# Altium PCB PCB_Instruction Register 1.0V_2021-10-21.pcbdoc
Units mm, origin at the board's own origin, x right, y up, seen from the top; angles counter-clockwise.
Board outline 124.71 x 83.95 mm, 2 copper layers (Top Layer, Bottom Layer); 28 components, 33 nets, 114 pads, 35 vias.
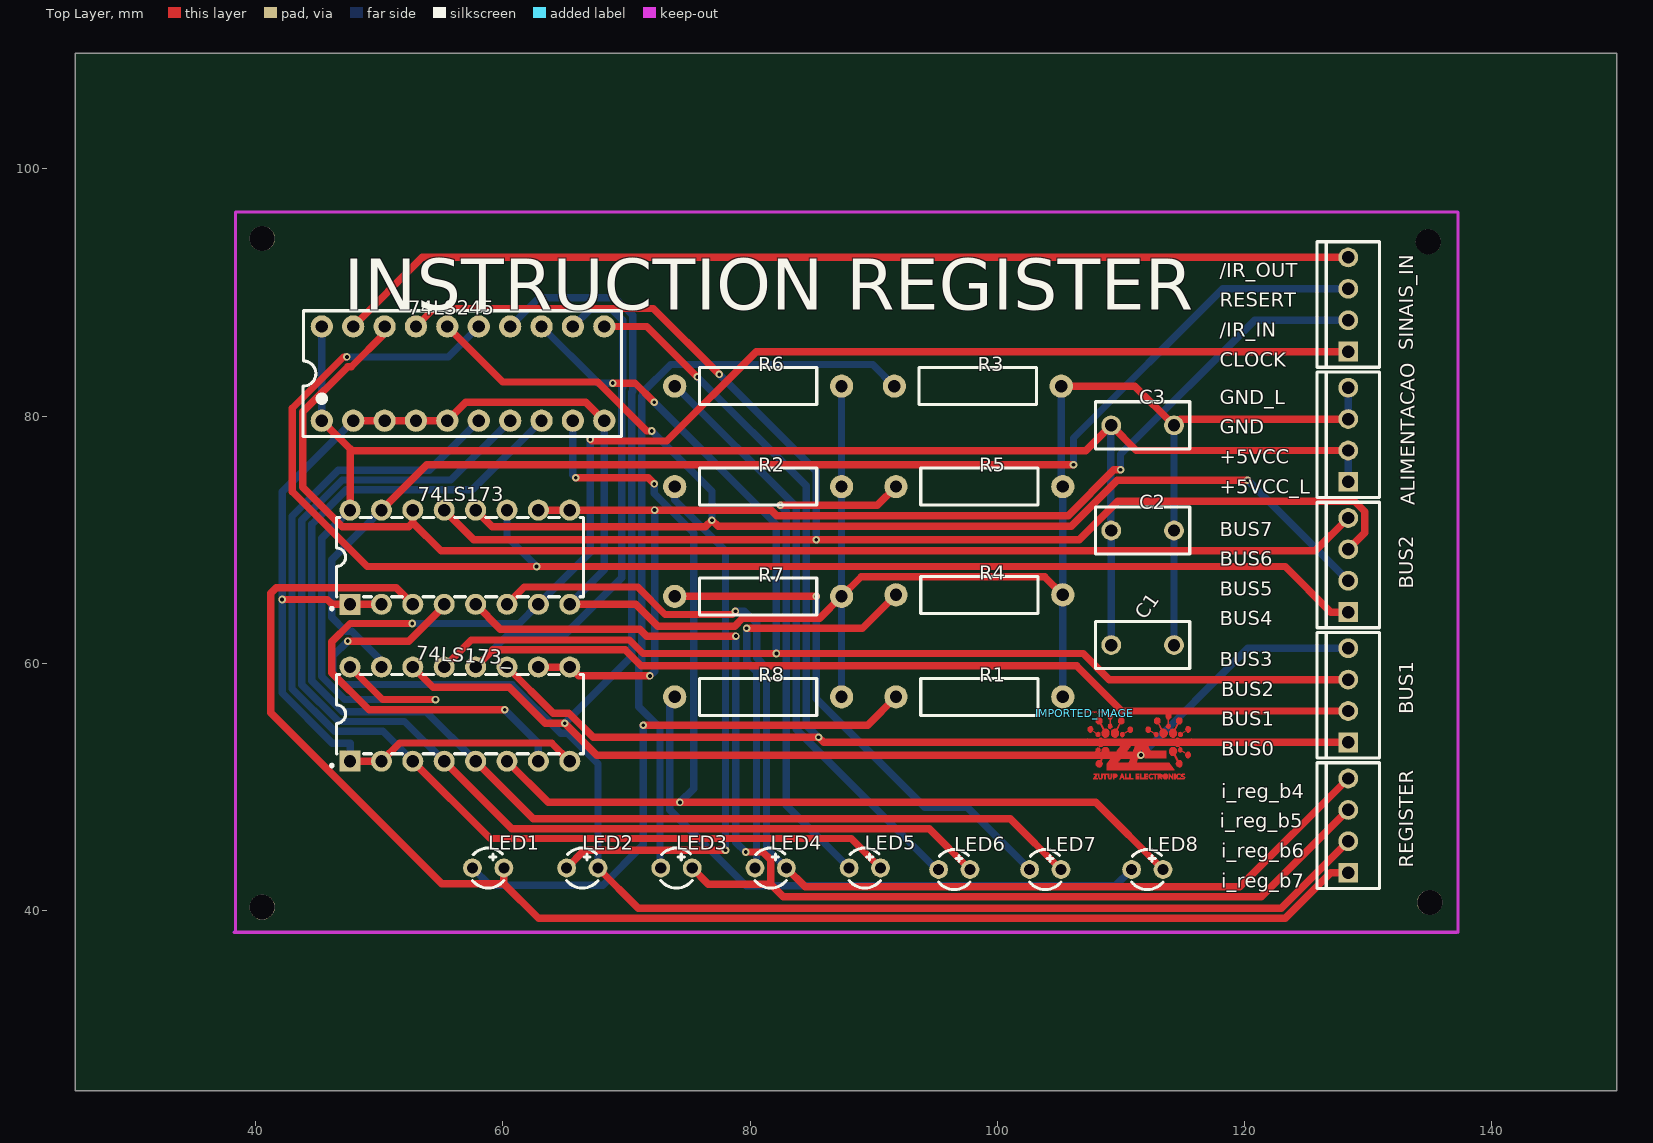
[diagram p0: Top Layer view]
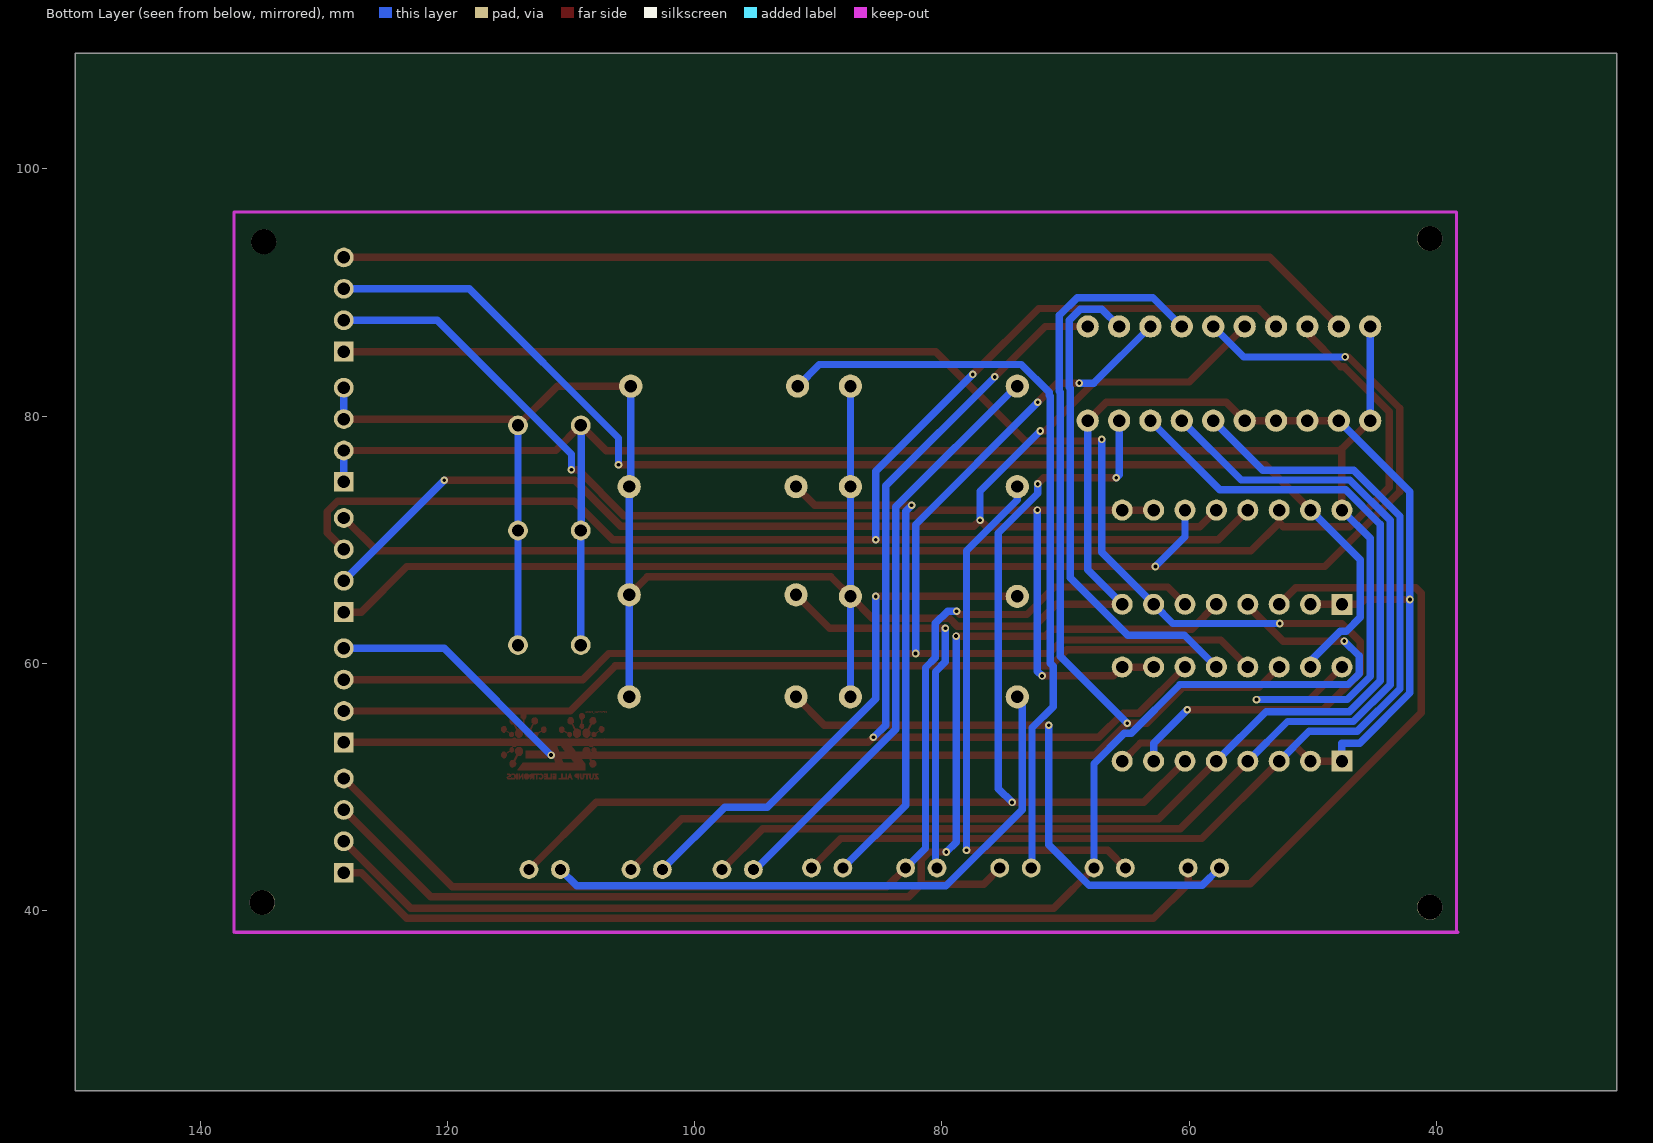
[diagram p1: Bottom Layer view, seen from below]

## Layer stack, top to bottom
Top Layer: signal copper (thickness not stored)
Dielectric: dielectric 0.32, FR-4, Dk 4.8
Bottom Layer: signal copper (thickness not stored)

## Board outline
150.114,25.4 25.4,25.4 25.4,109.347 150.114,109.347

## Components (designator, comment, footprint, x,y, rotation, side; value= is the part's Value field where it differs from the comment)
74LS173 "SN74LS173AN" PDIP-16_L19.7-W6.6-P2.54-LS7.6-BL 56.515,68.58 r0 top
74LS173_ "SN74LS173AN" PDIP-16_L19.7-W6.6-P2.54-LS7.6-BL 56.515,55.88 r0 top
74LS245 "SN74LS245N" DIP-20_L25.5-W10.0-P2.54-LS7.6-BL 56.769,83.439 r0 top
ALIMENTACAO "ALIM." HDR-TH_4P-P2.54-D1.0 128.397,78.486 r90 top
BUS1 "BUS1" HDR-TH_4P-P2.54-D1.0 128.397,57.404 r90 top
BUS2 "BUS2" HDR-TH_4P-P2.54-D1.0 128.397,67.945 r90 top
C1 "100nF 63V poli7" CAP-TH_L7.6-W3.8-P5.08-D0.51 111.76,61.468 r0 top
C2 "100nF 63V poli" CAP-TH_L7.6-W3.8-P5.08-D0.51 111.76,70.739 r0 top
C3 "100nF 63V poli" CAP-TH_L7.6-W3.8-P5.08-D0.51 111.76,79.248 r0 top
IMPORTED_IMAGE "IMPORTED_IMAGE" IMPORTED_IMAGE 107.084,55.95 r0 top
LED1 "VERDE" LED-TH_BD3.0-P2.54-RD-GREEN 58.801,43.434 r0 top
LED2 "VERDE" LED-TH_BD3.0-P2.54-RD-GREEN 66.421,43.434 r0 top
LED3 "VERDE" LED-TH_BD3.0-P2.54-RD-GREEN 74.041,43.434 r0 top
LED4 "VERDE" LED-TH_BD3.0-P2.54-RD-GREEN 81.661,43.434 r0 top
LED5 "VERDE" LED-TH_BD3.0-P2.54-RD-GREEN 89.281,43.434 r0 top
LED6 "VERDE" LED-TH_BD3.0-P2.54-RD-GREEN 96.52,43.307 r0 top
LED7 "VERDE" LED-TH_BD3.0-P2.54-RD-GREEN 103.886,43.307 r0 top
LED8 "VERDE" LED-TH_BD3.0-P2.54-RD-GREEN 112.141,43.307 r0 top
R1 "470" RES-TH_BD3.0-L9.5-P13.50-D0.6 98.552,57.277 r0 top
R2 "470" RES-TH_BD3.0-L9.5-P13.50-D0.6 80.645,74.295 r0 top
R3 "470" RES-TH_BD3.0-L9.5-P13.50-D0.6 98.425,82.423 r0 top
R4 "470" RES-TH_BD3.0-L9.5-P13.50-D0.6 98.552,65.532 r0 top
R5 "470" RES-TH_BD3.0-L9.5-P13.50-D0.6 98.552,74.295 r0 top
R6 "470" RES-TH_BD3.0-L9.5-P13.50-D0.6 80.645,82.423 r0 top
R7 "470" RES-TH_BD3.0-L9.5-P13.50-D0.6 80.645,65.405 r0 top
R8 "470" RES-TH_BD3.0-L9.5-P13.50-D0.6 80.645,57.277 r0 top
REGISTER "REGIST." HDR-TH_4P-P2.54-D1.0 128.397,46.863 r90 top
SINAIS_IN "SINAIS IN" HDR-TH_4P-P2.54-D1.0 128.397,89.027 r90 top

## Footprints (in the part's own frame and the unit in brackets; to place one, negate y for a bottom-side part, rotate by r counter-clockwise, add the part's x,y. Pads: shape width x height; smd on the part's side, far side on the other; paste and mask are expansions set on the pad)
CAP-TH_L7.6-W3.8-P5.08-D0.51 [mm]
  round 1.6 hole 1: 1(-2.54,0) 2(2.54,0)
  silkscreen extent -3.81,-1.91 3.81,1.91
DIP-20_L25.5-W10.0-P2.54-LS7.6-BL [mm]
  round 1.8 hole 1: 1(-11.43,-3.81) 2(-8.89,-3.81) 3(-6.35,-3.81) 4(-3.81,-3.81) 5(-1.27,-3.81) 6(1.27,-3.81) 7(3.81,-3.81) 8(6.35,-3.81) 9(8.89,-3.81) 10(11.43,-3.81) 11(11.43,3.81) 12(8.89,3.81) 13(6.35,3.81) 14(3.81,3.81) 15(1.27,3.81) 16(-1.27,3.81) 17(-3.81,3.81) 18(-6.35,3.81) 19(-8.89,3.81) 20(-11.43,3.81)
  silkscreen extent -12.95,-5.08 12.83,5.08
HDR-TH_4P-P2.54-D1.0 [mm]
  rect 1.6x1.6 hole 1: 1(-3.81,0)
  round 1.6 hole 1: 2(-1.27,0) 3(1.27,0) 4(3.81,0)
  silkscreen extent -5.08,-2.54 5.08,2.54
IMPORTED_IMAGE [mm]
  Top Layer region: 1.05,-5.287 1.063,-5.331 0.684,-5.331 0.684,-5.297 0.685,-5.293 0.686,-5.288 0.689,-5.282 0.692,-5.275 0.696,-5.267 0.7,-5.258 0.706,-5.249 0.712,-5.239 0.718,-5.228 0.726,-5.217 0.733,-5.206 0.741,-5.194 0.75,-5.182 0.759,-5.17 0.768,-5.158 0.778,-5.146 0.798,-5.12 0.815,-5.097 0.83,-5.077 0.842,-5.06 0.852,-5.045 0.859,-5.031 0.863,-5.02 0.865,-5.011 0.865,-5.004 0.862,-4.998 0.857,-4.993 0.849,-4.99 0.839,-4.987 0.826,-4.986 0.811,-4.985 0.793,-4.985 0.716,-4.985 0.716,-4.881 1.027,-4.881 1.027,-4.93 1.026,-4.936 1.025,-4.942 1.023,-4.949 1.02,-4.957 1.017,-4.966 1.013,-4.975 1.009,-4.985 1.004,-4.995 0.998,-5.005 0.992,-5.016 0.986,-5.027 0.979,-5.038 0.972,-5.049 0.964,-5.06 0.957,-5.071 0.949,-5.082 0.932,-5.105 0.917,-5.125 0.904,-5.143 0.894,-5.158 0.886,-5.171 0.881,-5.183 0.878,-5.193 0.877,-5.201 0.878,-5.208 0.882,-5.213 0.888,-5.218 0.897,-5.222 0.907,-5.225 0.921,-5.228 0.936,-5.231 0.954,-5.233 1.037,-5.244
  Top Layer region: 2.302,-5.331 2.302,-4.881 2.393,-4.881 2.415,-4.881 2.436,-4.882 2.456,-4.884 2.474,-4.887 2.491,-4.89 2.507,-4.894 2.522,-4.899 2.536,-4.906 2.549,-4.912 2.561,-4.92 2.572,-4.929 2.582,-4.939 2.591,-4.95 2.6,-4.962 2.608,-4.975 2.615,-4.989 2.647,-5.054 2.583,-5.187 2.489,-5.209 2.395,-5.232 2.395,-5.331 hole: 1094689.812,508877.754 1094689.812,508159.95 1094689.812,508159.95 1095771.598,508391.852 1095771.598,508391.852 1095979.878,509595.304 1095979.878,509595.304 1094689.812,509595.304 1094689.812,509595.304 1094689.812,508877.754
  Top Layer region: 1.68,-5.158 1.68,-5.331 1.587,-5.331 1.587,-4.985 1.47,-4.985 1.452,-5.109 1.448,-5.135 1.442,-5.161 1.436,-5.186 1.429,-5.211 1.421,-5.233 1.413,-5.253 1.405,-5.27 1.398,-5.282 1.361,-5.331 1.153,-5.331 1.089,-5.197 1.089,-4.881 1.182,-4.881 1.182,-5.184 1.273,-5.267 1.305,-5.245 1.338,-5.223 1.338,-4.881 1.804,-4.881 1.804,-4.985 1.68,-4.985
  Top Layer region: 6.671,-5.276 6.622,-5.331 6.413,-5.331 6.315,-5.222 6.315,-5.007 6.418,-4.881 6.617,-4.881 6.665,-4.941 6.679,-4.96 6.692,-4.981 6.702,-5.002 6.711,-5.023 6.717,-5.046 6.722,-5.068 6.725,-5.091 6.727,-5.114 6.726,-5.137 6.724,-5.159 6.72,-5.181 6.713,-5.202 6.706,-5.222 6.696,-5.242 6.684,-5.26 hole: 1135841.114,506853.12 1137036.692,507565.082 1137036.692,507565.082 1136940.426,508493.706 1136940.426,508493.706 1136843.906,509422.33 1136843.906,509422.33 1135999.102,509530.788 1135999.102,509530.788 1135154.552,509638.992 1135154.552,509638.992 1134729.864,507756.852 1134729.864,507756.852 1135841.114,506853.12
  Top Layer region: 4.418,-5.279 4.418,-5.331 4.107,-5.331 4.107,-4.881 4.418,-4.881 4.418,-4.985 4.2,-4.985 4.2,-5.054 4.387,-5.054 4.387,-5.158 4.2,-5.158 4.2,-5.227 4.418,-5.227
  Top Layer region: 7.155,-5.106 7.155,-5.331 7.066,-5.331 6.875,-5.073 6.875,-5.331 6.782,-5.331 6.782,-4.881 6.86,-4.881 6.96,-5.011 7.06,-5.14 7.061,-5.011 7.062,-4.881 7.155,-4.881
  Top Layer region: 3.23,-5.304 3.241,-5.331 3.111,-5.331 3.111,-5.227 2.931,-5.227 2.895,-5.331 2.793,-5.331 2.814,-5.275 2.853,-5.171 2.895,-5.062 2.964,-4.881 3.068,-4.881 3.16,-5.119 hole: 1100600.646,508383.978 1100600.646,507864.548 1100600.646,507864.548 1101222.946,507864.548 1101222.946,507864.548 1101222.946,508903.154 1101222.946,508903.154 1100600.646,508903.154 1100600.646,508903.154 1100600.646,508383.978
  Top Layer region: 5.369,-5.33 5.278,-5.331 5.221,-5.273 5.164,-5.216 5.164,-4.988 5.233,-4.935 5.303,-4.881 5.463,-4.881 5.538,-4.964 5.538,-4.881 5.88,-4.881 5.88,-4.985 5.755,-4.985 5.755,-5.331 5.662,-5.331 5.662,-4.991 5.293,-4.991 5.275,-5.045 5.256,-5.098 5.291,-5.22 5.39,-5.263 5.426,-5.229 5.462,-5.196 5.508,-5.229 5.553,-5.261 5.506,-5.296 5.495,-5.302 5.481,-5.309 5.465,-5.315 5.447,-5.32 5.428,-5.324 5.408,-5.327 5.388,-5.329
  Top Layer region: 7.342,-5.106 7.342,-5.331 7.218,-5.331 7.218,-4.881 7.342,-4.881
  Top Layer region: 1.932,-5.331 1.884,-5.254 1.835,-5.177 1.835,-4.881 1.96,-4.881 1.96,-5.223 2.025,-5.267 2.115,-5.184 2.115,-4.881 2.209,-4.881 2.209,-5.197 2.144,-5.331
  Top Layer region: 4.48,-5.331 4.48,-4.881 4.573,-4.881 4.573,-5.227 4.76,-5.227 4.76,-5.331
  Top Layer region: 3.912,-5.287 3.925,-5.331 3.609,-5.331 3.609,-4.881 3.702,-4.881 3.702,-5.222 3.9,-5.244
  Top Layer region: 6.035,-5.279 6.035,-5.331 5.911,-5.331 5.911,-4.881 6.133,-4.881 6.253,-4.952 6.253,-5.154 6.185,-5.2 6.219,-5.238 6.232,-5.254 6.243,-5.272 6.25,-5.289 6.253,-5.303 6.249,-5.318 6.239,-5.327 6.225,-5.33 6.206,-5.329 6.186,-5.323 6.165,-5.312 6.146,-5.297 6.129,-5.279 6.111,-5.259 6.093,-5.242 6.076,-5.231 6.063,-5.227 6.035,-5.227 hole: 1131088.52,508159.95 1131632.842,508276.79 1131632.842,508276.79 1132177.418,508393.376 1132177.418,508393.376 1132177.418,509412.932 1132177.418,509412.932 1131088.52,509646.104 1131088.52,509646.104 1131088.52,508159.95
  Top Layer region: 3.267,-5.331 3.267,-4.881 3.36,-4.881 3.36,-5.227 3.578,-5.227 3.578,-5.331
  Top Layer region: 5.102,-5.279 5.102,-5.331 4.791,-5.331 4.791,-4.881 5.102,-4.881 5.102,-4.985 4.915,-4.985 4.915,-5.054 5.107,-5.054 5.094,-5.097 5.082,-5.14 4.999,-5.151 4.915,-5.162 4.915,-5.227 5.102,-5.227
  Top Layer region: 8.054,-5.325 7.495,-5.323 7.404,-5.222 7.404,-5.007 7.456,-4.944 7.507,-4.881 7.708,-4.881 7.777,-4.974 7.739,-5.016 7.553,-4.974 7.526,-5.023 7.52,-5.034 7.515,-5.046 7.511,-5.06 7.506,-5.074 7.503,-5.089 7.5,-5.104 7.499,-5.118 7.498,-5.13 7.497,-5.19 7.562,-5.228 7.626,-5.266 7.705,-5.193 7.727,-5.217 7.734,-5.222 7.745,-5.227 7.76,-5.231 7.778,-5.236 7.799,-5.24 7.822,-5.243 7.847,-5.246 7.872,-5.248 7.995,-5.255 8.027,-5.198 7.921,-5.159 7.814,-5.12 7.797,-5.069 7.779,-5.019 7.815,-4.915 7.887,-4.895 7.903,-4.891 7.92,-4.888 7.937,-4.885 7.954,-4.884 7.971,-4.883 7.987,-4.883 8.001,-4.884 8.014,-4.886 8.068,-4.898 8.081,-4.941 8.094,-4.985 7.902,-4.985 7.902,-5.012 7.904,-5.018 7.909,-5.025 7.918,-5.033 7.929,-5.042 7.943,-5.051 7.959,-5.06 7.976,-5.069 7.995,-5.078 8.088,-5.117 8.108,-5.172 8.127,-5.228
  Top Layer region: 7.249,-4.575 7.249,-4.604 1.773,-4.604 1.774,-4.353 1.775,-4.102 2.318,-3.392 2.427,-3.249 2.528,-3.115 2.621,-2.992 2.701,-2.883 2.768,-2.793 2.818,-2.723 2.85,-2.676 2.861,-2.657 2.862,-2.631 1.94,-2.631 1.876,-2.553 1.862,-2.536 1.849,-2.517 1.836,-2.496 1.824,-2.475 1.813,-2.455 1.804,-2.435 1.796,-2.416 1.791,-2.399 1.77,-2.323 1.82,-2.215 1.87,-2.108 1.938,-2.077 2.007,-2.047 3.01,-2.044 3.211,-2.044 3.399,-2.045 3.57,-2.046 3.718,-2.048 3.841,-2.051 3.934,-2.054 3.993,-2.057 4.013,-2.06 4.012,-2.066 4.008,-2.078 4.001,-2.095 3.992,-2.116 3.981,-2.142 3.968,-2.172 3.954,-2.205 3.938,-2.241 3.921,-2.279 3.903,-2.319 3.89,-2.346 3.768,-2.613 3.222,-3.298 3.112,-3.436 3.01,-3.566 2.917,-3.684 2.836,-3.787 2.769,-3.873 2.719,-3.939 2.687,-3.982 2.675,-3.999 2.678,-4.001 2.684,-4.003 2.695,-4.004 2.709,-4.006 2.727,-4.007 2.749,-4.008 2.774,-4.01 2.801,-4.011 2.832,-4.012 2.865,-4.013 2.9,-4.013 2.938,-4.014 2.977,-4.015 3.018,-4.015 3.06,-4.015 3.104,-4.015 3.533,-4.015 3.905,-3.029 4.278,-2.043 4.59,-2.043 4.902,-2.042 5.088,-2.536 5.274,-3.029 6.595,-3.047 6.595,-3.635 4.863,-3.635 4.729,-3.288 4.701,-3.219 4.675,-3.154 4.65,-3.095 4.627,-3.044 4.607,-3.002 4.591,-2.97 4.579,-2.949 4.572,-2.942 4.565,-2.954 4.551,-2.986 4.531,-3.035 4.506,-3.1 4.477,-3.177 4.446,-3.263 4.413,-3.355 4.379,-3.451 4.345,-3.547 4.313,-3.642 4.282,-3.731 4.255,-3.812 4.233,-3.882 4.215,-3.938 4.204,-3.978 4.2,-3.999 4.207,-4.001 4.227,-4.002 4.259,-4.004 4.304,-4.005 4.359,-4.007 4.425,-4.008 4.501,-4.009 4.586,-4.011 4.68,-4.012 4.781,-4.013 4.89,-4.013 5.005,-4.014 5.125,-4.015 5.251,-4.015 5.382,-4.015 5.516,-4.015 6.831,-4.015 7.04,-4.281 7.082,-4.335 7.121,-4.386 7.156,-4.434 7.187,-4.477 7.213,-4.514 7.232,-4.543 7.244,-4.564
  Top Layer region: 1.27,-4.348 1.179,-4.4 1.111,-4.377 1.095,-4.37 1.079,-4.362 1.06,-4.351 1.042,-4.339 1.023,-4.326 1.005,-4.312 0.988,-4.297 0.972,-4.282 0.902,-4.211 0.902,-3.99 0.967,-3.899 1.031,-3.808 1.241,-3.808 1.348,-3.596 1.455,-3.384 1.331,-3.149 1.351,-3.032 1.37,-2.915 1.452,-2.825 1.533,-2.735 1.809,-2.735 1.9,-2.836 1.991,-2.937 1.991,-3.218 1.813,-3.44 1.551,-3.447 1.45,-3.657 1.349,-3.866 1.395,-3.973 1.44,-4.08 1.36,-4.295
  Top Layer region: 7.7,-4.376 7.621,-4.398 7.533,-4.347 7.444,-4.295 7.404,-4.188 7.364,-4.08 7.41,-3.972 7.456,-3.864 7.245,-3.443 6.993,-3.443 6.813,-3.218 6.813,-2.937 6.904,-2.836 6.995,-2.735 7.271,-2.735 7.431,-2.913 7.452,-3.015 7.472,-3.118 7.412,-3.253 7.351,-3.389 7.457,-3.598 7.563,-3.808 7.773,-3.808 7.837,-3.899 7.902,-3.99 7.902,-4.179 7.84,-4.266 7.778,-4.354
  Top Layer region: 0.449,-3.634 0.437,-3.635 0.382,-3.635 0.3,-3.563 0.218,-3.491 0.218,-3.276 0.353,-3.115 0.515,-3.115 0.579,-3.165 0.642,-3.215 0.772,-3.128 0.902,-3.042 0.902,-2.878 0.953,-2.822 1.003,-2.765 1.1,-2.776 1.197,-2.787 1.28,-2.981 1.184,-3.145 1.06,-3.188 0.994,-3.149 0.927,-3.109 0.654,-3.271 0.688,-3.389 0.593,-3.592 0.543,-3.613 0.532,-3.617 0.519,-3.621 0.505,-3.625 0.491,-3.628 0.477,-3.631 0.463,-3.633
  Top Layer region: 8.504,-3.563 8.422,-3.635 8.367,-3.635 8.341,-3.633 8.313,-3.628 8.285,-3.621 8.261,-3.613 8.211,-3.592 8.116,-3.389 8.133,-3.33 8.15,-3.271 8.014,-3.19 7.877,-3.109 7.81,-3.149 7.744,-3.188 7.682,-3.167 7.62,-3.145 7.574,-3.066 7.527,-2.987 7.548,-2.921 7.553,-2.907 7.559,-2.892 7.565,-2.877 7.572,-2.862 7.579,-2.848 7.586,-2.834 7.593,-2.822 7.599,-2.812 7.63,-2.769 7.804,-2.769 7.853,-2.824 7.902,-2.878 7.902,-3.042 8.032,-3.128 8.162,-3.215 8.289,-3.115 8.442,-3.115 8.586,-3.266 8.586,-3.491
  Top Layer region: 1.178,-2.7 1.058,-2.629 1.011,-2.526 0.963,-2.423 0.525,-2.423 0.368,-2.631 0.153,-2.631 0.076,-2.546 0,-2.461 0,-2.222 0.198,-2.036 0.291,-2.057 0.385,-2.078 0.441,-2.135 0.463,-2.16 0.481,-2.188 0.493,-2.215 0.498,-2.238 0.498,-2.285 0.963,-2.285 1.012,-2.178 1.062,-2.072 1.161,-2.024 1.183,-2.013 1.202,-2.004 1.22,-1.996 1.235,-1.99 1.249,-1.985 1.262,-1.981 1.275,-1.979 1.287,-1.978 1.299,-1.979 1.311,-1.981 1.324,-1.984 1.338,-1.989 1.354,-1.995 1.371,-2.002 1.39,-2.011 1.412,-2.021 1.516,-2.07 1.618,-2.231 1.618,-2.426 1.571,-2.528 1.524,-2.629 1.464,-2.664 1.404,-2.7
  Top Layer region: 7.377,-2.7 7.214,-2.544 7.196,-2.398 7.178,-2.251 7.231,-2.161 7.284,-2.071 7.383,-2.024 7.405,-2.013 7.425,-2.004 7.442,-1.996 7.457,-1.99 7.472,-1.985 7.485,-1.981 7.497,-1.979 7.509,-1.978 7.521,-1.979 7.533,-1.981 7.547,-1.984 7.561,-1.989 7.577,-1.995 7.594,-2.003 7.614,-2.012 7.636,-2.022 7.742,-2.071 7.792,-2.178 7.841,-2.285 8.306,-2.285 8.306,-2.238 8.307,-2.228 8.311,-2.215 8.316,-2.202 8.323,-2.188 8.331,-2.174 8.341,-2.16 8.351,-2.147 8.363,-2.135 8.419,-2.078 8.513,-2.057 8.606,-2.036 8.705,-2.129 8.804,-2.222 8.804,-2.461 8.728,-2.546 8.651,-2.631 8.443,-2.631 8.374,-2.56 8.348,-2.53 8.326,-2.501 8.312,-2.475 8.306,-2.456 8.306,-2.423 7.841,-2.423 7.746,-2.629 7.626,-2.7
  Top Layer region: 5.384,-2.631 5.274,-2.366 5.252,-2.313 5.231,-2.261 5.213,-2.214 5.196,-2.171 5.183,-2.134 5.173,-2.104 5.166,-2.083 5.164,-2.072 5.164,-2.042 6.847,-2.042 6.935,-2.093 7.023,-2.144 7.043,-2.2 7.047,-2.213 7.05,-2.23 7.053,-2.249 7.056,-2.271 7.059,-2.294 7.06,-2.317 7.062,-2.34 7.062,-2.363 7.062,-2.471 6.994,-2.551 6.927,-2.631
  Top Layer region: 1.551,-1.973 1.461,-1.874 1.372,-1.774 1.35,-1.676 1.328,-1.578 1.391,-1.45 1.454,-1.321 1.231,-0.9 1.055,-0.9 0.979,-0.815 0.902,-0.73 0.902,-0.622 0.903,-0.599 0.905,-0.575 0.908,-0.55 0.912,-0.526 0.917,-0.503 0.922,-0.481 0.929,-0.462 0.935,-0.446 0.968,-0.377 1.036,-0.346 1.052,-0.34 1.068,-0.334 1.087,-0.329 1.105,-0.324 1.124,-0.32 1.143,-0.317 1.16,-0.315 1.176,-0.314 1.247,-0.312 1.324,-0.396 1.4,-0.481 1.4,-0.748 1.329,-0.827 1.436,-1.028 1.543,-1.229 1.619,-1.239 1.636,-1.241 1.654,-1.244 1.674,-1.247 1.694,-1.251 1.714,-1.254 1.734,-1.258 1.752,-1.262 1.768,-1.266 1.841,-1.284 1.916,-1.374 1.991,-1.464 1.99,-1.606 1.99,-1.748 1.936,-1.822 1.924,-1.838 1.91,-1.854 1.894,-1.87 1.878,-1.885 1.861,-1.9 1.845,-1.914 1.829,-1.925 1.814,-1.934 1.746,-1.973
  Top Layer region: 2.652,-1.872 2.55,-1.973 2.459,-1.973 2.439,-1.972 2.417,-1.97 2.394,-1.966 2.37,-1.961 2.347,-1.955 2.325,-1.948 2.304,-1.94 2.286,-1.932 2.204,-1.89 2.16,-1.795 2.15,-1.773 2.142,-1.751 2.135,-1.729 2.129,-1.707 2.124,-1.684 2.121,-1.662 2.118,-1.639 2.117,-1.617 2.118,-1.594 2.119,-1.572 2.122,-1.549 2.125,-1.526 2.13,-1.504 2.137,-1.481 2.144,-1.458 2.153,-1.436 2.19,-1.345 2.361,-1.246 2.567,-1.245 2.671,-1.034 2.775,-0.824 2.741,-0.786 2.707,-0.748 2.707,-0.515 2.773,-0.377 2.841,-0.346 2.856,-0.34 2.873,-0.334 2.891,-0.329 2.91,-0.324 2.929,-0.32 2.947,-0.317 2.964,-0.315 2.98,-0.314 3.052,-0.312 3.204,-0.481 3.204,-0.757 3.122,-0.828 3.04,-0.9 2.876,-0.9 2.761,-1.115 2.647,-1.331 2.7,-1.396 2.753,-1.461 2.753,-1.771
  Top Layer region: 7.343,-1.874 7.253,-1.973 7.058,-1.973 6.99,-1.934 6.975,-1.925 6.959,-1.914 6.943,-1.9 6.926,-1.885 6.91,-1.87 6.894,-1.854 6.88,-1.838 6.868,-1.822 6.814,-1.748 6.814,-1.606 6.813,-1.464 6.963,-1.284 7.036,-1.266 7.052,-1.262 7.07,-1.258 7.09,-1.254 7.11,-1.251 7.13,-1.247 7.15,-1.244 7.168,-1.241 7.185,-1.239 7.261,-1.229 7.475,-0.827 7.404,-0.748 7.404,-0.481 7.564,-0.303 7.793,-0.344 7.847,-0.418 7.902,-0.492 7.902,-0.73 7.749,-0.9 7.573,-0.9 7.35,-1.321 7.476,-1.578 7.454,-1.676 7.432,-1.774
  Top Layer region: 6.254,-1.973 6.152,-1.872 6.051,-1.771 6.051,-1.461 6.157,-1.331 6.043,-1.115 5.928,-0.9 5.764,-0.9 5.682,-0.828 5.6,-0.757 5.6,-0.481 5.76,-0.303 5.989,-0.344 6.043,-0.418 6.098,-0.492 6.098,-0.748 6.028,-0.825 6.132,-1.035 6.236,-1.246 6.437,-1.246 6.518,-1.288 6.6,-1.329 6.644,-1.424 6.689,-1.52 6.689,-1.7 6.644,-1.795 6.6,-1.89 6.518,-1.932 6.5,-1.94 6.48,-1.948 6.457,-1.955 6.434,-1.961 6.41,-1.966 6.387,-1.97 6.365,-1.972 6.345,-1.973
  Top Layer region: 5.789,-1.944 5.725,-1.921 5.66,-1.899 5.611,-1.815 5.562,-1.731 5.593,-1.64 5.457,-1.56 5.321,-1.479 5.231,-1.562 5.04,-1.568 4.915,-1.443 4.915,-1.2 4.967,-1.136 5.018,-1.073 5.226,-1.073 5.289,-1.142 5.351,-1.212 5.351,-1.415 5.483,-1.503 5.614,-1.59 5.674,-1.523 5.844,-1.523 5.942,-1.632 5.942,-1.833 5.866,-1.889
  Top Layer region: 3.048,-1.934 3.035,-1.935 3.022,-1.933 3.008,-1.93 2.995,-1.925 2.98,-1.918 2.965,-1.909 2.949,-1.898 2.931,-1.885 2.862,-1.831 2.862,-1.632 2.96,-1.523 3.13,-1.523 3.189,-1.587 3.321,-1.5 3.453,-1.412 3.453,-1.212 3.515,-1.142 3.578,-1.073 3.775,-1.073 3.889,-1.188 3.889,-1.443 3.764,-1.568 3.573,-1.562 3.484,-1.479 3.344,-1.561 3.205,-1.644 3.239,-1.764 3.161,-1.851 3.144,-1.869 3.129,-1.885 3.114,-1.898 3.1,-1.91 3.087,-1.919 3.073,-1.926 3.061,-1.931
  Top Layer region: 7.871,-1.852 7.832,-1.904 7.634,-1.904 7.597,-1.862 7.56,-1.821 7.56,-1.594 7.722,-1.475 7.804,-1.527 7.886,-1.579 8.018,-1.491 8.15,-1.403 8.116,-1.284 8.164,-1.182 8.186,-1.141 8.209,-1.104 8.232,-1.077 8.251,-1.062 8.261,-1.058 8.272,-1.055 8.285,-1.051 8.299,-1.048 8.313,-1.046 8.328,-1.044 8.343,-1.042 8.357,-1.041 8.422,-1.038 8.504,-1.11 8.586,-1.182 8.586,-1.414 8.504,-1.486 8.422,-1.558 8.287,-1.558 8.23,-1.511 8.173,-1.464 8.041,-1.546 7.91,-1.628 7.91,-1.8
  Top Layer region: 0.972,-1.904 0.894,-1.8 0.894,-1.638 0.764,-1.551 0.633,-1.463 0.575,-1.51 0.517,-1.558 0.382,-1.558 0.3,-1.486 0.218,-1.414 0.218,-1.182 0.382,-1.038 0.437,-1.038 0.463,-1.04 0.491,-1.045 0.519,-1.052 0.543,-1.06 0.593,-1.081 0.688,-1.284 0.671,-1.343 0.654,-1.403 0.786,-1.491 0.918,-1.579 1,-1.527 1.082,-1.475 1.163,-1.535 1.244,-1.594 1.244,-1.821 1.17,-1.904
  Top Layer region: 2.133,-1.231 2.062,-1.283 1.899,-1.214 1.88,-1.129 1.861,-1.043 1.881,-0.973 1.901,-0.904 2.022,-0.861 2.022,-0.485 1.98,-0.485 1.971,-0.483 1.96,-0.479 1.947,-0.473 1.934,-0.464 1.921,-0.454 1.907,-0.442 1.894,-0.429 1.882,-0.415 1.825,-0.345 1.825,-0.139 1.882,-0.07 1.938,0 2.147,0 2.271,-0.138 2.271,-0.331 2.174,-0.485 2.084,-0.485 2.084,-0.865 2.115,-0.865 2.122,-0.867 2.13,-0.872 2.14,-0.88 2.151,-0.89 2.162,-0.903 2.173,-0.917 2.184,-0.933 2.195,-0.95 2.245,-1.035 2.225,-1.107 2.204,-1.179
  Top Layer region: 6.822,-1.249 6.742,-1.283 6.671,-1.231 6.6,-1.179 6.559,-1.035 6.609,-0.95 6.631,-0.917 6.653,-0.89 6.674,-0.872 6.689,-0.865 6.72,-0.865 6.72,-0.485 6.63,-0.485 6.582,-0.408 6.533,-0.331 6.533,-0.138 6.595,-0.069 6.658,0 6.866,0 6.922,-0.07 6.979,-0.139 6.979,-0.345 6.922,-0.415 6.897,-0.442 6.87,-0.464 6.845,-0.479 6.824,-0.485 6.782,-0.485 6.782,-0.861 6.906,-0.905 6.943,-1.068 6.901,-1.215
LED-TH_BD3.0-P2.54-RD-GREEN [mil]
  round 60 hole 35.43: 1(-50,0) 2(50,0)
  silkscreen extent -50,-64 50,64
PDIP-16_L19.7-W6.6-P2.54-LS7.6-BL [mm]
  rect 1.7x1.7 hole 1: 1(-8.89,-3.81)
  round 1.7 hole 1: 2(-6.35,-3.81) 3(-3.81,-3.81) 4(-1.27,-3.81) 5(1.27,-3.81) 6(3.81,-3.81) 7(6.35,-3.81) 8(8.89,-3.81) 9(8.89,3.81) 10(6.35,3.81) 11(3.81,3.81) 12(1.27,3.81) 13(-1.27,3.81) 14(-3.81,3.81) 15(-6.35,3.81) 16(-8.89,3.81)
  silkscreen extent -10.46,-4.26 10,3.2
RES-TH_BD3.0-L9.5-P13.50-D0.6 [mm]
  round 1.88 hole 1: 1(-6.75,0) 2(6.75,0)
  silkscreen extent -4.75,-1.5 4.75,1.5

## Free pads (board coordinates)
  round 2.032 hole 2.032 unplated: ""(40.513,40.259) ""(40.513,94.361) ""(134.874,94.107) ""(135.001,40.64)

## Via types
v1: diameter 0.61, hole 0.305, Top Layer to Bottom Layer, 35 vias

## Nets (pads, with @x,y where several pads share a name; then routed paths per layer and width w, separated by ;. In a path a pad name is that pad's centre, name@x,y a point inside that pad or via, vN(x,y) a via of type N, cw(c..) or ccw(c..) an arc to the next point about the centre after c; other vN are vias at no path point)
+5V: 74LS173.16 74LS173_.16 74LS245.1 74LS245.20 ALIMENTACAO.1 ALIMENTACAO.2 C1.1 C2.1 C3.1 | length 151
  Top Layer w0.6: 74LS245.1 47.625,77.343 47.625,77.181 ; 74LS173_.16 50.253,57.062 v1(54.541,57.062) ; 74LS173.16 47.625,77.181 ; ALIMENTACAO.2 111.252,77.216 C3.1 107.153,77.181 47.625,77.181
  Bottom Layer w0.6: 74LS245.1 74LS245.20 ; 74LS173.16 45.338,70.103 45.338,58.924 47.199,57.063 v1(54.541,57.062) ; C1.1 C2.1 109.164,70.795 109.164,79.192 C3.1 ; ALIMENTACAO.1 ALIMENTACAO.2
GND: 74LS173.1 74LS173.2 74LS173.8 74LS173_.1 74LS173_.2 74LS173_.8 74LS245.2 74LS245.3 74LS245.4 74LS245.5 74LS245.10 ALIMENTACAO.3 ALIMENTACAO.4 C1.2 C2.2 C3.2 R1.2 R2.2 R3.2 R4.2 R5.2 R6.2 R7.2 R8.2 | length 236.1
  Top Layer w0.6: v1(42.122,65.158) 45.786,65.158 46.174,64.77 74LS173.1 74LS173.2 ; 74LS173_.1 49.077,52.07 74LS173_.2 51.64,53.545 63.93,53.545 74LS173_.8 ; 74LS245.2 74LS245.3 74LS245.4 74LS245.5 57.002,81.132 66.696,81.132 74LS245.10 ; 74LS173.8 70.751,64.77 72.522,62.999 78.752,62.999 79.381,63.628 85.618,63.628 87.395,65.405 88.971,66.981 103.853,66.981 R4.2@105.302,65.532 ; R3.2@105.175,82.423 111.125,82.423 C3.2 114.808,79.756 ALIMENTACAO.3
  Bottom Layer w0.6: v1(42.122,65.158) v1@42.126,65.158 ; 74LS173_.1 47.625,53.521 46.2,53.521 42.126,57.595 v1@42.126,65.158 ; 74LS245.2 42.126,73.876 v1@42.126,65.158 ; 74LS173.8 68.199,67.564 74LS245.10 ; R8.2@87.395,57.277 87.395,65.405 87.395,74.295 R6.2@87.395,82.423 ; R3.2@105.175,82.423 105.175,74.422 105.302,74.295 105.302,65.532 R1.2@105.302,57.277 ; C1.2 C2.2 C3.2 ; ALIMENTACAO.3 ALIMENTACAO.4
LED1_1: LED1.1 R1.1 | length 46.8
  Top Layer w0.6: v1(71.359,54.981) 89.506,54.981 R1.1@91.802,57.277
  Bottom Layer w0.6: LED1.1 58.932,42.033 68.094,42.033 71.359,45.299 v1(71.359,54.981)
LED2_1: LED2.1 R2.1 | length 44.6
  Top Layer w0.6: LED2.1 66.574,44.857 v1(78.006,44.857)
  Bottom Layer w0.6: R2.1@73.895,74.295 73.895,73.212 78.006,69.1 v1(78.006,44.857)
LED3_1: LED3.1 R3.1 | length 61.4
  Bottom Layer w0.6: LED3.1 72.705,43.5 72.705,54.777 70.992,56.489 70.992,59.751 71.23,59.989 71.23,81.6 71.302,81.673 71.302,81.912 73.566,84.176 89.922,84.176 R3.1@91.675,82.423
LED4_1: LED4.1 R4.1 | length 33
  Top Layer w0.6: v1(79.715,62.821) 89.091,62.821 R4.1@91.802,65.532
  Bottom Layer w0.6: v1(79.715,62.821) 79.715,60.127 80.518,59.324 80.518,43.561 LED4.1
R5_1: LED5.1 R5.1 | length 41.6
  Top Layer w0.6: v1(82.447,72.791) 90.298,72.791 R5.1@91.802,74.295
  Bottom Layer w0.6: v1(82.447,72.791) 82.931,72.308 82.931,61.125 82.935,61.121 82.935,48.51 LED5.1
R6_1: LED6.1 R6.1 | length 48.1
  Bottom Layer w0.6: R6.1@73.895,82.423 73.957,82.423 83.734,72.646 83.734,61.458 83.738,61.453 83.738,54.656 95.087,43.307 LED6.1
R7_1: LED7.1 R7.1 | length 42.7
  Top Layer w0.6: R7.1@73.895,65.405 v1(85.344,65.405)
  Bottom Layer w0.6: v1(85.344,65.405) 85.344,57.135 94.126,48.353 97.57,48.353 LED7.1
R8_1: LED8.1 R8.1 | length 49.8
  Bottom Layer w0.6: R8.1@73.895,57.277 73.508,56.89 73.508,48.136 79.665,41.979 109.543,41.979 LED8.1
S$31: 
S$33: 
S$35: 
U1_3: 74LS173.3 LED1.2 REGISTER.1 | length 118.8
  Top Layer w0.6: 74LS173.3 51.353,66.122 41.663,66.122 41.21,65.669 41.21,56.001 55.05,42.161 60.071,42.161 ; LED1.2 60.071,42.161 ; REGISTER.1 126.995,43.053 123.302,39.359 62.873,39.359 60.071,42.161
U1_4: 74LS173.4 LED2.2 REGISTER.2 | length 109.5
  Top Layer w0.6: v1(47.438,61.792) 52.378,61.792 55.245,64.659 74LS173.4 ; LED2.2 70.947,40.178 122.982,40.178 REGISTER.2
  Bottom Layer w0.6: v1(47.438,61.792) 46.235,60.589 46.235,59.162 47.122,58.275 60.733,58.275 64.67,54.339 65.233,54.339 67.691,51.881 LED2.2
U1_5: 74LS173.5 LED3.2 REGISTER.3 | length 101.1
  Top Layer w0.6: 74LS173.5 59.79,62.765 71.054,62.765 71.626,62.192 v1(78.85,62.192) ; LED3.2 76.623,42.122 81.661,42.122 ; v1(79.644,44.724) 81.036,44.724 81.661,44.099 81.661,42.122 ; REGISTER.3 121.365,41.101 82.682,41.101 81.661,42.122
  Bottom Layer w0.6: v1(78.85,62.192) 78.85,45.518 v1(79.644,44.724)
U1_6: 74LS173.6 LED4.2 REGISTER.4 | length 92.7
  Top Layer w0.6: 74LS173.6 61.722,66.167 70.891,66.167 73.114,63.944 78.555,63.944 v1(78.814,64.203) ; LED4.2 84.461,41.904 119.628,41.904 REGISTER.4
  Bottom Layer w0.6: v1(78.814,64.203) 79.539,64.203 80.522,63.22 80.522,60.455 81.325,59.652 81.325,45.04 LED4.2
U1_7: 74LS173.7 74LS173_.7 SINAIS_IN.1 | length 120.5
  Top Layer w0.6: v1(52.658,63.213) 47.619,63.213 46.157,61.752 46.157,59.236 49.158,56.235 v1(60.143,56.235) ; v1(67.061,78.106) 67.183,77.984 73.263,77.984 80.496,85.217 SINAIS_IN.1
  Bottom Layer w0.6: v1(52.658,63.213) 61.308,63.213 74LS173.7 67.061,68.966 v1(67.061,78.106) ; v1(60.143,56.235) 62.865,53.513 74LS173_.7
U1_9: 74LS173.9 74LS173.10 74LS173_.9 74LS173_.10 SINAIS_IN.2 | length 95.9
  Top Layer w0.6: 74LS173_.10 74LS173_.9 66.124,58.971 v1(71.891,58.971) ; 74LS173.10 74LS173.9 v1(72.268,72.39) 81.707,72.39 82.15,71.948 105.728,71.948 109.428,75.648 v1(109.971,75.648)
  Bottom Layer w0.6: v1(71.891,58.971) 72.268,59.348 v1(72.268,72.39) ; v1(109.971,75.648) 109.971,76.903 120.826,87.757 SINAIS_IN.2
U1_11: 74LS173.11 74LS245.15 BUS2.1 | length 119.6
  Top Layer w0.6: v1(47.372,84.782) 47.094,84.782 42.964,80.652 42.964,73.878 49.015,67.827 v1(62.72,67.827) 123.304,67.827 126.995,64.135 BUS2.1
  Bottom Layer w0.6: v1(47.372,84.782) 55.572,84.782 74LS245.15 ; 74LS173.11 60.325,70.222 v1(62.72,67.827)
U1_12: 74LS173.12 74LS245.16 BUS2.2 | length 105.8
  Top Layer w0.6: 74LS245.16 59.991,82.757 67.663,82.757 71.629,78.791 v1(72.047,78.791) ; 74LS173.12 59.139,71.036 76.371,71.036 v1(76.91,71.576) 77.405,71.081 105.997,71.081 109.717,74.801 v1(120.271,74.801)
  Bottom Layer w0.6: v1(72.047,78.791) 76.91,73.928 v1(76.91,71.576) ; v1(120.271,74.801) BUS2.2
U1_13: 74LS173.13 74LS245.17 BUS2.3 | length 124.7
  Top Layer w0.6: 74LS245.17 54.414,88.704 72.17,88.704 v1(77.506,83.368) ; 74LS173.13 57.641,69.994 v1(85.344,69.994) 106.633,69.994 109.748,73.109 128.901,73.109 129.735,72.275 129.735,70.553 BUS2.3
  Bottom Layer w0.6: v1(77.506,83.368) 85.344,75.53 v1(85.344,69.994)
U1_14: 74LS173.14 74LS245.18 BUS2.4 | length 105.1
  Top Layer w0.6: 74LS245.18 50.419,86.688 47.706,83.974 47.425,83.974 43.795,80.345 43.795,74.24 46.998,71.038 52.374,71.038 52.705,71.369 ; 74LS173.14 52.705,71.369 ; BUS2.4 125.728,69.086 54.988,69.086 52.705,71.369
U1_15: 74LS173.15 74LS173_.15 SINAIS_IN.3 | length 103.2
  Top Layer w0.6: 74LS173.15 53.841,76.066 v1(106.167,76.066)
  Bottom Layer w0.6: 74LS173_.15 50.165,60.207 47.773,62.6 47.255,62.6 46.142,63.713 46.142,68.367 74LS173.15 ; v1(106.167,76.066) 106.167,78.221 118.243,90.297 SINAIS_IN.3
U2_3: 74LS173_.3 74LS245.6 LED5.2 | length 85.9
  Top Layer w0.6: 74LS173_.3 58.961,45.814 88.171,45.814 LED5.2
  Bottom Layer w0.6: 74LS173_.3 50.293,54.482 46.375,54.482 42.929,57.927 42.929,71.895 46.663,75.628 54.038,75.628 74LS245.6
U2_4: 74LS173_.4 74LS245.7 LED6.2 | length 93.7
  Top Layer w0.6: 74LS173_.4 60.697,46.618 94.479,46.618 LED6.2
  Bottom Layer w0.6: 74LS173_.4 52.03,55.285 46.707,55.285 43.732,58.259 43.732,71.562 46.995,74.825 55.775,74.825 74LS245.7
U2_5: 74LS173_.5 74LS245.8 LED7.2 | length 101.7
  Top Layer w0.6: 74LS173_.5 62.434,47.421 101.042,47.421 LED7.2
  Bottom Layer w0.6: 74LS173_.5 53.767,56.088 47.039,56.088 44.535,58.591 44.535,71.23 47.327,74.022 57.512,74.022 74LS245.8
U2_6: 74LS173_.6 74LS245.9 LED8.2 | length 95.6
  Top Layer w0.6: 74LS173_.6 63.657,48.738 v1(74.315,48.738) 107.98,48.738 LED8.2 ; v1(65.89,74.999) 71.753,74.999 v1(72.24,74.512)
  Bottom Layer w0.6: 74LS245.9 65.659,75.23 v1(65.89,74.999) ; v1(72.24,74.512) 72.24,73.731 75.435,70.536 75.435,49.858 v1(74.315,48.738)
U2_11: 74LS173_.11 74LS245.11 BUS1.1 | length 113
  Top Layer w0.6: 74LS173_.11 64.062,55.953 65.338,55.953 67.291,54.001 v1(85.535,54.001) 85.941,53.594 126.995,53.594 BUS1.1 ; 74LS245.11 71.642,87.249 v1(75.727,83.165)
  Bottom Layer w0.6: v1(75.727,83.165) 84.537,74.355 84.537,61.79 84.541,61.785 84.541,54.994 v1(85.535,54.001)
U2_12: 74LS173_.12 74LS245.12 BUS1.2 | length 113.9
  Top Layer w0.6: 74LS173_.12 59.169,61.074 69.907,61.074 71.202,59.779 106.421,59.779 110.066,56.134 BUS1.2
  Bottom Layer w0.6: 74LS173_.12 60.365,62.27 64.952,62.27 69.607,66.925 69.607,82.247 69.697,82.337 69.697,87.748 68.787,88.658 67.068,88.658 74LS245.12
U2_13: 74LS173_.13 74LS245.13 BUS1.3 | length 111.5
  Top Layer w0.6: 74LS173_.13 57.431,61.876 70.239,61.876 71.329,60.787 v1(82.128,60.787) 106.949,60.787 109.062,58.674 BUS1.3 ; v1(68.889,82.672) 70.682,82.672 v1(72.24,81.114)
  Bottom Layer w0.6: 74LS245.13 67.696,82.672 v1(68.889,82.672) ; v1(72.24,81.114) 82.128,71.226 v1(82.128,60.787)
U2_14: 74LS173_.14 74LS245.14 BUS1.4 | length 129
  Top Layer w0.6: 74LS173_.14 54.337,58.058 60.496,58.058 63.408,55.146 v1(65.004,55.146) 67.583,52.567 v1(111.624,52.567)
  Bottom Layer w0.6: 74LS245.14 62.913,89.583 69.058,89.583 70.499,88.141 70.499,82.005 70.41,81.916 70.41,60.552 v1(65.004,55.146) ; v1(111.624,52.567) 120.271,61.214 BUS1.4
U3_19: 74LS245.19 SINAIS_IN.4 | length 82.8
  Top Layer w0.6: 74LS245.19 53.467,92.837 SINAIS_IN.4

## Silkscreen, mask and mechanical layers (free items; w line width, h text height)
Top Overlay:
  text "/IR_OUT" at 117.983,91.249 h1.14
  text "RESERT" at 117.983,88.837 h1.14
  text "INSTRUCTION REGISTER" at 47.117,88.607 h4.14
  text "/IR_IN" at 117.983,86.423 h1.14
  text "CLOCK" at 117.983,84.01 h1.14
  text "GND_L" at 117.983,80.962 h1.14
  text "GND" at 117.983,78.549 h1.14
  text "+5VCC" at 117.983,76.136 h1.14
  text "+5VCC_L" at 117.983,73.724 h1.14
  text "BUS7" at 117.983,70.294 h1.14
  text "BUS6" at 117.983,67.882 h1.14
  text "BUS5" at 117.983,65.468 h1.14
  text "BUS4" at 117.983,63.055 h1.14
  text "BUS3" at 117.983,59.753 h1.14
  text "BUS2" at 118.11,57.34 h1.14
  text "BUS1" at 118.11,54.927 h1.14
  text "BUS0" at 118.11,52.514 h1.14
  text "i_reg_b4" at 118.11,49.085 h1.14
  text "i_reg_b5" at 117.983,46.672 h1.14
  text "i_reg_b6" at 118.11,44.259 h1.14
  text "i_reg_b7" at 118.11,41.846 h1.14